# Altium PCB PCB1.PcbDoc
Units mm, origin at the board's own origin, x right, y up, seen from the top; angles counter-clockwise.
Board outline 300.94 x 149.92 mm, 2 copper layers (Top Layer, Bottom Layer); 68 components, 177 nets, 469 pads, 13 vias.
Unrouted connection lines stored in the file: 1.
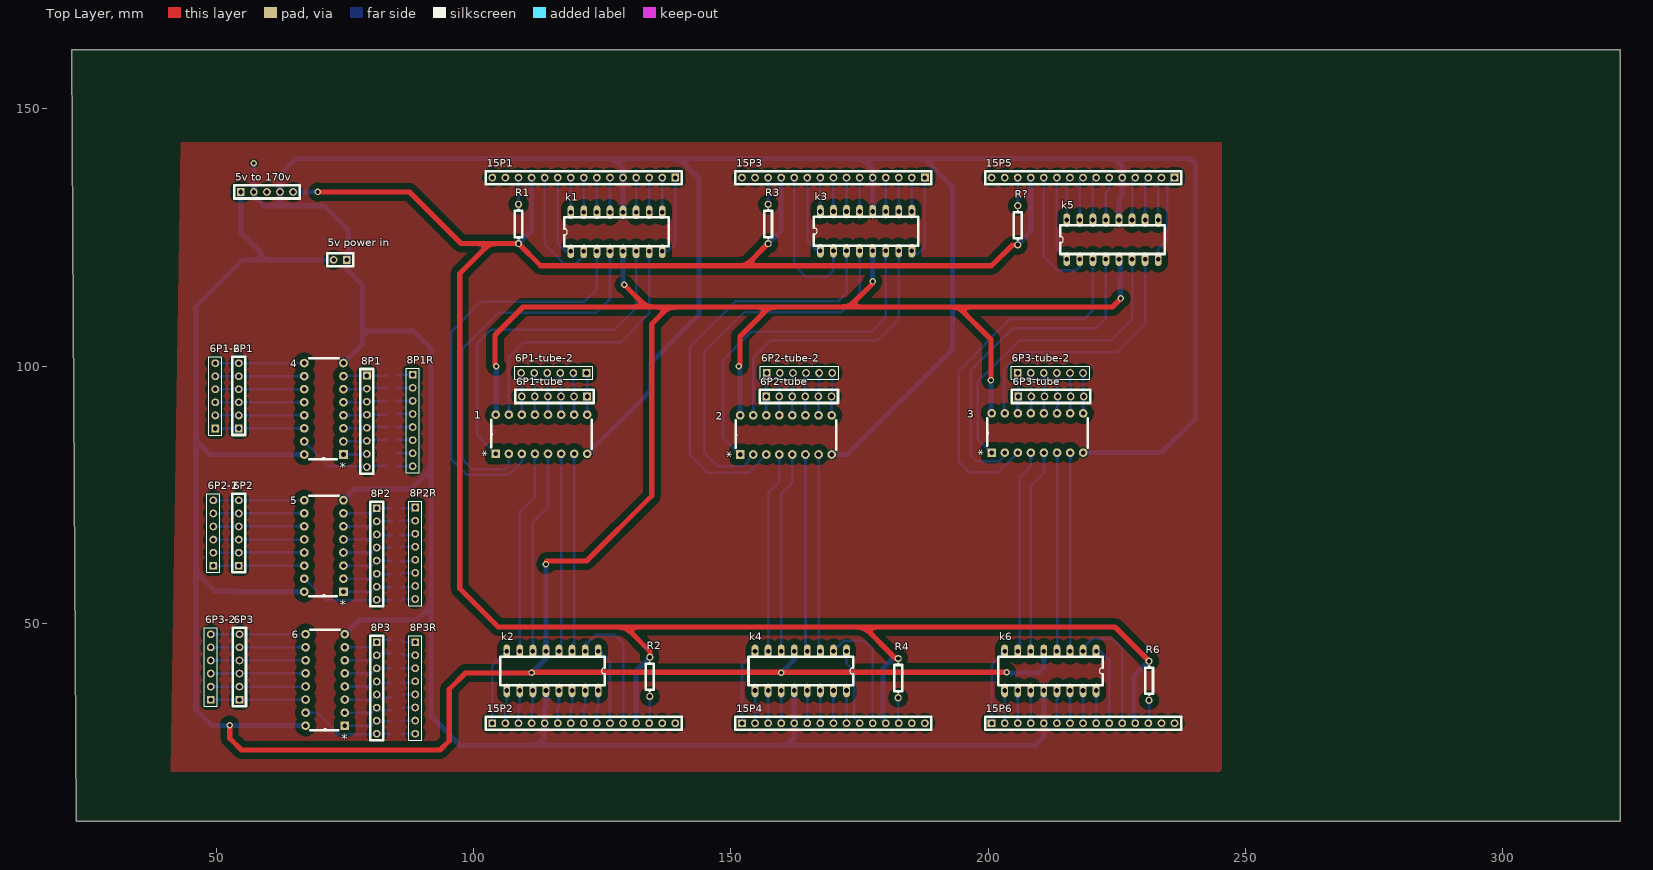
[diagram p0: Top Layer view]
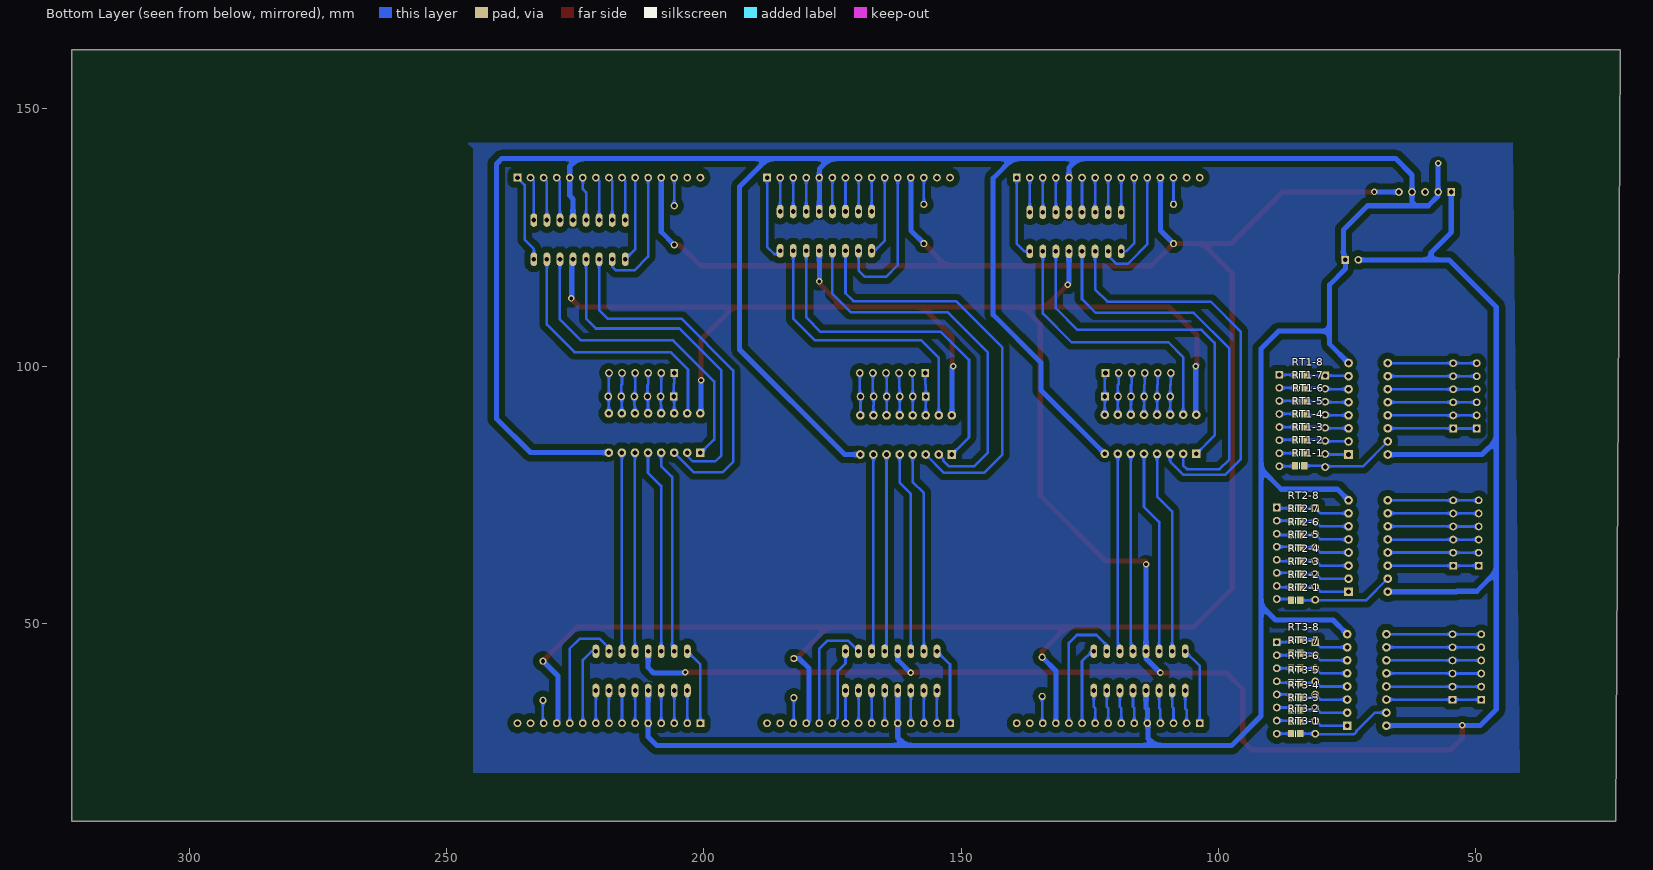
[diagram p1: Bottom Layer view, seen from below]

## Layer stack, top to bottom
Top Solder: solder mask 0.0102, Solder Resist, Dk 3.5
Top Layer: signal copper 0.0356
Dielectric 1: dielectric 0.32, FR-4, Dk 4.8
Bottom Layer: signal copper 0.0356
Bottom Solder: solder mask 0.0102, Solder Resist, Dk 3.5

## Board outline
22.098,126.111 21.898,161.481 322.834,161.481 322.834,11.557 22.747,11.557

## Design rules (kind name [scope] priority, off if disabled: settings)
Clearance [All] p1: gap=0.6 ignorepadtopadclearanceinfootprint=FALSE
NetsToIgnore [All] p1:
PolygonConnect [All] p1: connectstyle=Relief reliefconductorwidth=0.254 reliefentries=4 polygonreliefangle="90 Angle" airgapwidth=0.254
RoutingLayers RoutingLayers_1 [All] p1: top layer_v5=TRUE bottom layer_v5=TRUE
RoutingPriority RoutingPriority_1 [All] p1: routingpriority=0
RoutingVias [All] p1: holewidth=0.711 width=1.27 viastyle="Through Hole" minholewidth=0.711 minwidth=1.27 maxholewidth=0.711 maxwidth=1.27
SolderMaskExpansion [All] p1: expansion=0.102
Width [All] p1: maxlimit=1 minlimit=0.5 preferedwidth=1 toplayer_minwidth=1 bottomlayer_prefwidth=0.5 minimp=50.000000 maximp=50.000000 favimp=50.000000
28 further rules are at their usual default settings.

## Components (designator, comment, footprint, x,y, rotation, side; value= is the part's Value field where it differs from the comment)
1 "74HC595" *DIP254P762X444-16 122.071,90.583 r90 top
2 "74HC595" *DIP254P762X444-16 169.569,90.449 r90 top
3 "74HC595" *DIP254P762X444-16 218.464,90.823 r90 top
4 "74HC595" *DIP254P762X444-16 67.07,100.608 r180 top
5 "74HC595" *DIP254P762X444-16 67.07,73.938 r180 top
"5v power in" "Header 2" HDR1X2 75.311,120.65 r180 top
"5v to 170v" "Header 5" HDR1X5 54.737,133.858 r0 top
6 "74HC595" *DIP254P762X444-16 67.324,47.903 r180 top
6P1 "Header 6" HDR1X6 54.356,87.884 r90 top
6P1-2 "Header 6" HDR1X6 49.784,87.884 r90 top
6P1-tube "Header 6" HDR1X6 122.047,94.107 r180 top
6P1-tube-2 "Header 6" HDR1X6 121.92,98.679 r180 top
6P2 "Header 6" HDR1X6 54.356,61.214 r90 top
6P2-2 "Header 6" HDR1X6 49.403,61.214 r90 top
6P2-tube "Header 6" HDR1X6 156.845,94.107 r0 top
6P2-tube-2 "Header 6" HDR1X6 156.972,98.679 r0 top
6P3 "Header 6" HDR1X6 54.483,35.179 r90 top
6P3-2 "Header 6" HDR1X6 48.895,35.179 r90 top
6P3-tube "Header 6" HDR1X6 205.867,94.107 r0 top
6P3-tube-2 "Header 6" HDR1X6 205.74,98.679 r0 top
8P1 "Header 8" HDR1X8 79.248,98.171 r270 top
8P1R "Header 8" HDR1X8 88.138,98.321 r270 top
8P2 "Header 8" HDR1X8 81.153,72.367 r270 top
8P2R "Header 8" HDR1X8 88.646,72.517 r270 top
8P3 "Header 8" HDR1X8 81.153,46.332 r270 top
8P3R "Header 8" HDR1X8 88.646,46.355 r270 top
15P1 "Header 15" HDR1X15 139.192,136.652 r180 top
15P2 "Header 15" HDR1X15 103.632,30.607 r0 top
15P3 "Header 15" HDR1X15 187.706,136.652 r180 top
15P4 "Header 15" HDR1X15 152.146,30.607 r0 top
15P5 "Header 15" HDR1X15 236.22,136.652 r180 top
15P6 "Header 15" HDR1X15 200.66,30.607 r0 top
k1 "K155ID1" K155ID1 -1.905,234.061 r0 top
k2 "K155ID1" K155ID1 244.983,-67.183 r180 top
k3 "K155ID1" K155ID1 46.609,234.188 r0 top
k4 "K155ID1" K155ID1 293.243,-67.183 r180 top
k5 "K155ID1" K155ID1 94.488,232.537 r0 top
k6 "K155ID1" K155ID1 341.757,-67.183 r180 top
R1 "Res2" AXIAL-0.3 108.712,127.635 r90 top value=22K
R2 "Res2" AXIAL-0.3 134.239,39.624 r270 top value=22K
R3 "Res3" AXIAL-0.3 157.226,127.635 r90 top value=22K
R4 "Res4" AXIAL-0.3 182.499,39.37 r270 top value=22K
R6 "Res6" AXIAL-0.3 231.267,38.862 r90 top value=22K
R? "Res5" AXIAL-0.3 205.74,127.381 r90 top value=22K
RT1-1 "Res Thermal" 6-0805_N 84.201,80.645 r0 bottom
RT1-2 "Res Thermal" 6-0805_N 84.201,83.167 r0 bottom
RT1-3 "Res Thermal" 6-0805_N 84.201,85.689 r0 bottom
RT1-4 "Res Thermal" 6-0805_N 84.201,88.211 r0 bottom
RT1-5 "Res Thermal" 6-0805_N 84.201,90.732 r0 bottom
RT1-6 "Res Thermal" 6-0805_N 84.074,93.218 r0 bottom
RT1-7 "Res Thermal" 6-0805_N 84.201,95.776 r0 bottom
RT1-8 "Res Thermal" 6-0805_N 84.201,98.298 r0 bottom
RT2-1 "Res Thermal" 6-0805_N 84.963,54.483 r0 bottom
RT2-2 "Res Thermal" 6-0805_N 84.963,57.023 r0 bottom
RT2-3 "Res Thermal" 6-0805_N 84.963,59.563 r0 bottom
RT2-4 "Res Thermal" 6-0805_N 84.963,62.103 r0 bottom
RT2-5 "Res Thermal" 6-0805_N 84.963,64.77 r0 bottom
RT2-6 "Res Thermal" 6-0805_N 84.963,67.183 r0 bottom
RT2-7 "Res Thermal" 6-0805_N 84.963,69.85 r0 bottom
RT2-8 "Res Thermal" 6-0805_N 84.963,72.39 r0 bottom
RT3-1 "Res Thermal" 6-0805_N 84.963,28.575 r0 bottom
RT3-2 "Res Thermal" 6-0805_N 84.963,30.988 r0 bottom
RT3-3 "Res Thermal" 6-0805_N 84.963,33.147 r0 bottom
RT3-4 "Res Thermal" 6-0805_N 84.963,35.56 r0 bottom
RT3-5 "Res Thermal" 6-0805_N 84.963,38.481 r0 bottom
RT3-6 "Res Thermal" 6-0805_N 84.963,41.275 r0 bottom
RT3-7 "Res Thermal" 6-0805_N 84.963,44.196 r0 bottom
RT3-8 "Res Thermal" 6-0805_N 84.963,46.863 r0 bottom

## Footprints (in the part's own frame and the unit in brackets; to place one, negate y for a bottom-side part, rotate by r counter-clockwise, add the part's x,y. Pads: shape width x height; smd on the part's side, far side on the other; paste and mask are expansions set on the pad)
6-0805_N [mm] "Chip Resistor, Body 2.0x1.2mm, IPC Medium Density"
  rect 1.2x1.4 smd: 1(-0.9,0) 2(0.9,0)
  silkscreen extent 0,-0.6 0,0.6, body extent -1.07,-0.7 1.07,0.7, height 0.7
*DIP254P762X444-16 [mil]
  rect 66x66 hole 35.43: 1(-300,700)
  round 66 hole 35.43: 2(-300,600) 3(-300,500) 4(-300,400) 5(-300,300) 6(-300,200) 7(-300,100) 8(-300,0) 9(0,0) 10(0,100) 11(0,200) 12(0,300) 13(0,400) 14(0,500) 15(0,600) 16(0,700)
  silkscreen extent -262,-35 -38,735
AXIAL-0.3 [mm] "Axial Device, Thru-Hole; 2 Leads; 0.3 in Pin Spacing"
  round 1.4 hole 0.85: 1(-3.81,0) 2(3.81,0)
  silkscreen extent -2.77,-0.76 2.77,0.76
HDR1X2 [mm] "Connector; Header; 2 Position"
  rect 1.5x1.5 hole 0.9: 1(0,0)
  round 1.5 hole 0.9: 2(2.54,0)
  silkscreen extent -1.27,-1.27 3.81,1.27
HDR1X5 [mm] "Connector; Header; 5 Position"
  rect 1.5x1.5 hole 0.9: 1(0,0)
  round 1.5 hole 0.9: 2(2.54,0) 3(5.08,0) 4(7.62,0) 5(10.16,0)
  silkscreen extent -1.27,-1.27 11.43,1.27
HDR1X6 [mm] "Connector; Header; 6 Position"
  rect 1.5x1.5 hole 0.9: 1(0,0)
  round 1.5 hole 0.9: 2(2.54,0) 3(5.08,0) 4(7.62,0) 5(10.16,0) 6(12.7,0)
  silkscreen extent -1.27,-1.27 13.97,1.27
HDR1X8 [mm] "Connector; Header; 8 Position"
  rect 1.5x1.5 hole 0.9: 1(0,0)
  round 1.5 hole 0.9: 2(2.54,0) 3(5.08,0) 4(7.62,0) 5(10.16,0) 6(12.7,0) 7(15.24,0) 8(17.78,0)
  silkscreen extent -1.27,-1.27 19.05,1.27
HDR1X15 [mm] "Connector; Header; 15 Position"
  rect 1.5x1.5 hole 0.9: 1(0,0)
  round 1.5 hole 0.9: 2(2.54,0) 3(5.08,0) 4(7.62,0) 5(10.16,0) 6(12.7,0) 7(15.24,0) 8(17.78,0) 9(20.32,0) 10(22.86,0) 11(25.4,0) 12(27.94,0) 13(30.48,0) 14(33.02,0) 15(35.56,0)
  silkscreen extent -1.27,-1.27 36.83,1.27
K155ID1 [mil]
  oval 52x104 hole 35.43: 1(4755,-4400) 2(4855,-4400) 3(4955,-4400) 4(5055,-4400) 5(5155,-4400) 6(5255,-4400) 7(5355,-4400) 8(5455,-4400) 9(5455,-4100) 10(5355,-4100) 11(5255,-4100) 12(5155,-4100) 13(5055,-4100) 14(4955,-4100) 15(4855,-4100) 16(4755,-4100)
  silkscreen extent 4705,-4360 5505,-4140

## Part data
"5v power in": "Header, 2-Pin", LatestRevisionDate=17-Jul-2002, LatestRevisionNote="Re-released for DXP Platform.", Publisher="Altium Limited"
"5v to 170v": "Header, 5-Pin", LatestRevisionDate=17-Jul-2002, LatestRevisionNote="Re-released for DXP Platform.", Publisher="Altium Limited"
6P1 6P1-2 6P1-tube 6P1-tube-2 6P2 6P2-2 6P2-tube 6P2-tube-2 6P3 6P3-2 6P3-tube 6P3-tube-2: "Header, 6-Pin", LatestRevisionDate=17-Jul-2002, LatestRevisionNote="Re-released for DXP Platform.", Publisher="Altium Limited"
8P1 8P1R 8P2 8P2R 8P3 8P3R: "Header, 8-Pin", LatestRevisionDate=17-Jul-2002, LatestRevisionNote="Re-released for DXP Platform.", Publisher="Altium Limited"
15P1 15P2 15P3 15P4 15P5 15P6: "Header, 15-Pin", LatestRevisionDate=17-Jul-2002, LatestRevisionNote="Re-released for DXP Platform.", Publisher="Altium Limited"
R1 R2 R3 R4 R6 R?: library part Res1, "Resistor", LatestRevisionDate=17-Jul-2002, LatestRevisionNote="Re-released for DXP Platform.", PackageDescription="Axial Device, Thru-Hole; 2 Leads; 0.3 in Pin Spacing", PackageReference=AXIAL-0.3, Published=8-Jun-2000, Publisher="Altium Limited"
RT1-1 RT1-2 RT1-3 RT1-4 RT1-5 RT1-6 RT1-7 RT1-8 RT2-1 RT2-2 RT2-3 RT2-4 RT2-5 RT2-6 RT2-7 RT2-8 RT3-1 RT3-2 RT3-3 RT3-4 RT3-5 RT3-6 RT3-7 RT3-8: "Thermistor", Code_IPC=RESC2012, LatestRevisionDate=29-May-2009, LatestRevisionNote="IPC-7351 Footprint Added.", PackageDescription="Chip Resistor 0805 Case Size", PackageReference=6-0805, PackageVersion=Mar-2003, Published=24-Mar-1999, Publisher="Altium Limited"

## Via types
v1: diameter 1.27, hole 0.711, Top Layer to Bottom Layer, 13 vias

## Nets (pads, with @x,y where several pads share a name; then routed paths per layer and width w, separated by ;. In a path a pad name is that pad's centre, name@x,y a point inside that pad or via, vN(x,y) a via of type N, cw(c..) or ccw(c..) an arc to the next point about the centre after c; other vN are vias at no path point)
GND: 1.8 2.8 3.8 4.8 5.8 6.8 15P1.5 15P2.5 15P3.5 15P4.5 15P5.5 15P6.5 "5v power in.1" "5v to 170v.2" "5v to 170v.4" k1.12 k2.12 k3.12 k4.12 k5.12 k6.12 | length 768.8
  Bottom Layer w1: v1@57.277,139.065 57.277,133.858 57.277,133.096 59.182,131.191 70.993,131.191 75.692,126.492 75.692,121.031 75.311,120.65 75.311,118.872 78.359,115.824 78.359,106.807 ; 61.722,131.318 62.357,131.953 62.357,133.858 62.357,137.16 65.532,140.335 127.254,140.335 ; 5.8 76.835,76.082 87.766,76.082 91.694,80.01 ; 4.8 78.359,104.276 78.359,106.807 ; 6.8 77.715,50.673 88.9,50.673 91.694,53.467 ; k2.12 114.046,33.579 113.792,33.325 15P2.5 113.665,30.607 113.665,27.686 112.268,26.289 ; 1.8 134.493,95.385 134.493,100.711 143.764,109.982 143.764,136.525 139.954,140.335 ; k1.12 15P1.5 129.032,138.557 127.254,140.335 ; k4.12 15P4.5 162.306,27.813 160.782,26.289 ; 2.8 172.618,82.829 193.04,103.251 193.04,134.874 187.579,140.335 ; k3.12 15P3.5 177.546,138.303 175.514,140.335 ; k6.12 15P6.5 210.82,27.94 209.169,26.289 160.782,26.289 ; 3.8 233.698,83.203 240.284,89.789 240.284,139.319 239.268,140.335 224.536,140.335 ; k5.12 225.425,132.512 226.06,133.147 15P5.5 226.06,138.811 224.536,140.335 ; 78.359,106.807 88.265,106.807 91.694,103.378 91.694,80.01 ; 91.694,53.467 91.694,32.004 97.409,26.289 112.268,26.289 ; 91.694,53.467 91.694,80.01 ; 112.268,26.289 160.782,26.289 ; 127.254,140.335 139.954,140.335 ; 139.954,140.335 175.514,140.335 ; 175.514,140.335 187.579,140.335 ; 187.579,140.335 224.536,140.335
  other v1: 57.277,139.446
Net1_1: 1.1 k1.6 | length 67.7
  Bottom Layer w0.5: 1.1 100.711,86.543 100.711,104.521 103.251,107.061 127.381,107.061 131.572,111.252 k1.6
Net1_2: 1.2 k1.4 | length 75.8
  Bottom Layer w0.5: 1.2 106.831,80.669 106.129,79.967 99.738,79.967 97.917,81.788 97.917,103.505 104.775,110.363 123.825,110.363 126.492,113.03 k1.4
Net1_3: 1.3 k1.3 | length 81.5
  Bottom Layer w0.5: 1.3 109.371,81.431 106.807,78.867 98.679,78.867 95.631,81.915 95.631,106.68 101.473,112.522 121.539,112.522 123.952,114.935 k1.3
Net1_4: 1.4 k2.7 | length 39.6
  Bottom Layer w0.5: k2.7 108.966,71.755 111.911,74.7 1.4
Net1_5: 1.5 k2.6 | length 39.6
  Bottom Layer w0.5: k2.6 111.506,69.723 114.451,72.668 1.5
Net1_6: 1.6 k2.4 | length 38.6
  Bottom Layer w0.5: k2.4 116.991,44.982 1.6
Net1_7: 1.7 k2.3 | length 38.6
  Bottom Layer w0.5: k2.3 119.531,44.982 1.7
Net1_9: 1.9 6P1-tube-2.1 6P1-tube.1 | length 8.2
  Bottom Layer w0.5: 6P1-tube-2.1 122.047,98.552 6P1-tube.1 122.047,92.354 122.071,92.331 1.9
Net1_10: 1.10 6P1-tube-2.2 6P1-tube.2 | length 8.2
  Bottom Layer w0.5: 6P1-tube-2.2 119.38,96.469 119.507,96.342 6P1-tube.2 119.507,92.354 119.531,92.331 1.10
Net1_11: 1.11 6P1-tube-2.3 6P1-tube.3 | length 8.2
  Bottom Layer w0.5: 6P1-tube-2.3 116.84,96.469 116.967,96.342 6P1-tube.3 116.967,92.354 116.991,92.331 1.11
Net1_12: 1.12 6P1-tube-2.4 6P1-tube.4 | length 8.2
  Bottom Layer w0.5: 6P1-tube-2.4 114.3,96.469 114.427,96.342 6P1-tube.4 114.427,92.354 114.451,92.331 1.12
Net1_13: 1.13 6P1-tube-2.5 6P1-tube.5 | length 8.2
  Bottom Layer w0.5: 6P1-tube-2.5 111.76,96.469 111.887,96.342 6P1-tube.5 111.887,92.354 111.911,92.331 1.13
Net1_14: 1.14 6P1-tube-2.6 6P1-tube.6 | length 8.2
  Bottom Layer w0.5: 6P1-tube-2.6 109.22,96.469 109.347,96.342 6P1-tube.6 109.347,92.354 109.371,92.331 1.14
Net1_15: 1.15 k1.7 | length 54
  Bottom Layer w0.5: 1.15 106.831,101.751 109.728,104.648 128.524,104.648 134.112,110.236 k1.7
Net1_16: 1.16 2.16 3.16 4.16 5.16 6.16 "5v power in.2" "5v to 170v.1" k1.5 k2.5 k3.5 k4.5 k5.5 k6.5 | length 680.9
  Top Layer w1: v1(52.578,30.226) 52.578,27.686 54.864,25.4 93.472,25.4 95.25,27.178 95.25,37.211 98.425,40.386 v1(111.252,40.386) v1@111.316,40.513 ; v1@104.14,100.203 104.14,106.045 109.601,111.506 133.604,111.506 ; v1@111.249,40.639 111.379,40.64 v1@111.316,40.513 ; v1(114.046,61.468) 114.173,62.103 121.92,62.103 134.62,74.803 134.62,108.204 137.922,111.506 ; v1(129.286,115.824) 133.604,111.506 ; v1(151.511,99.949) 151.765,100.203 151.765,105.791 157.48,111.506 ; v1(177.546,116.459) 177.546,116.078 172.974,111.506 ; v1(200.533,97.282) 200.533,105.156 194.183,111.506 ; v1(203.581,40.513) v1@111.316,40.513 ; v1(225.789,113.157) 224.138,111.506 194.183,111.506 ; 133.604,111.506 137.922,111.506 ; 137.922,111.506 157.48,111.506 ; 157.48,111.506 172.974,111.506 ; 172.974,111.506 194.183,111.506
  Bottom Layer w1: 54.737,133.858 54.737,125.984 58.674,122.047 58.674,120.65 ; 5.16 53.721,56.158 53.618,56.261 49.784,56.261 45.974,60.071 ; 4.16 67.047,82.804 48.768,82.804 45.974,85.598 ; 6.16 49.125,30.123 45.974,33.274 45.974,60.071 ; 72.771,120.65 58.674,120.65 ; v1@104.14,100.203 v1(104.394,99.949) 104.394,90.686 1.16 ; v1(111.252,40.386) 114.046,43.18 k2.5 v1(114.046,61.468) ; k1.5 129.032,116.078 v1(129.286,115.824) ; v1(151.511,99.949) 151.765,99.822 151.765,90.473 2.16 ; v1(159.766,40.386) 162.306,42.926 k4.5 ; v1(177.546,116.459) k3.5@177.546,121.793 ; v1(200.533,97.282) 200.533,90.974 3.16 ; v1(203.581,40.513) 204.089,40.386 209.804,40.386 210.82,41.402 k6.5 ; k5.5 225.679,120.523 225.679,113.538 v1(225.789,113.157) ; 45.974,60.071 45.974,85.598 ; 45.974,85.598 45.974,111.506 55.118,120.65 58.674,120.65
Net2_1: 2.1 k3.6 | length 67.1
  Bottom Layer w0.5: 2.1 148.463,86.155 148.463,101.219 153.924,106.68 177.292,106.68 180.086,109.474 k3.6@180.086,121.793
Net2_2: 2.2 k3.4 | length 73.9
  Bottom Layer w0.5: 2.2 153.477,81.977 153.477,81.639 152.356,80.518 147.447,80.518 144.78,83.185 144.78,102.616 152.654,110.49 171.45,110.49 175.006,114.046 k3.4@175.006,121.793
Net2_3: 2.3 k3.3 | length 81.1
  Bottom Layer w0.5: 2.3 153.288,79.248 145.542,79.248 141.986,82.804 141.986,103.632 151.003,112.649 170.942,112.649 172.466,114.173 k3.3@172.466,121.793
Net2_4: 2.4 k4.7 | length 39.2
  Bottom Layer w0.5: k4.7 157.226,75.311 159.409,77.494 2.4
Net2_5: 2.5 k4.6 | length 39.2
  Bottom Layer w0.5: k4.6 159.766,75.184 161.949,77.367 2.5
Net2_6: 2.6 k4.4 | length 38.4
  Bottom Layer w0.5: 2.6 164.489,44.934 k4.4
Net2_7: 2.7 k4.3 | length 38.4
  Bottom Layer w0.5: 2.7 167.029,44.934 k4.3
Net2_9: 2.9 6P2-tube-2.6 6P2-tube.6 | length 8.3
  Bottom Layer w0.5: 2.9 169.545,90.449 6P2-tube.6 169.672,94.234 6P2-tube-2.6
Net2_10: 2.10 6P2-tube-2.5 6P2-tube.5 | length 8.3
  Bottom Layer w0.5: 2.10 167.029,92.254 167.005,92.278 6P2-tube.5 167.132,94.234 6P2-tube-2.5
Net2_11: 2.11 6P2-tube-2.4 6P2-tube.4 | length 8.3
  Bottom Layer w0.5: 2.11 164.465,90.449 6P2-tube.4 164.465,98.552 6P2-tube-2.4
Net2_12: 2.12 6P2-tube-2.3 6P2-tube.3 | length 8.3
  Bottom Layer w0.5: 2.12 161.949,92.254 161.925,92.278 6P2-tube.3 161.925,95.656 162.052,95.783 6P2-tube-2.3
Net2_13: 2.13 6P2-tube-2.2 6P2-tube.2 | length 8.3
  Bottom Layer w0.5: 2.13 159.385,90.449 6P2-tube.2 159.385,97.663 159.512,97.79 6P2-tube-2.2
Net2_14: 2.14 6P2-tube-2.1 6P2-tube.1 | length 8.3
  Bottom Layer w0.5: 2.14 156.869,92.254 156.845,92.278 6P2-tube.1 156.845,96.317 156.972,96.444 6P2-tube-2.1
Net2_15: 2.15 k3.7 | length 55.2
  Bottom Layer w0.5: 2.15 154.329,101.624 157.734,105.029 178.435,105.029 182.626,109.22 k3.7@182.626,121.793
Net3_1: 3.1 k5.6 | length 61.7
  Bottom Layer w0.5: 3.1 200.515,83.203 197.993,85.725 197.993,97.028 205.994,105.029 223.901,105.029 227.965,109.093 k5.6
Net3_2: 3.2 k5.4 | length 66.7
  Bottom Layer w0.5: 3.2 203.224,82.574 202.165,81.515 197.758,81.515 196.596,82.677 196.596,99.187 204.724,107.315 220.98,107.315 222.885,109.22 k5.4
Net3_3: 3.3 k5.3 | length 72.4
  Bottom Layer w0.5: 3.3 201.936,79.375 196.342,79.375 194.31,81.407 194.31,99.187 204.343,109.22 218.694,109.22 220.345,110.871 k5.3
Net3_4: 3.4 k6.7 | length 39.7
  Bottom Layer w0.5: k6.7 206.169,45.006 206.169,78.486 208.304,80.621 3.4
Net3_5: 3.5 k6.6 | length 39.7
  Bottom Layer w0.5: k6.6 208.28,76.708 210.844,79.272 3.5
Net3_6: 3.6 k6.4 | length 38.6
  Bottom Layer w0.5: k6.4 213.384,44.601 3.6
Net3_7: 3.7 k6.3 | length 38.6
  Bottom Layer w0.5: k6.3 215.924,44.601 3.7
Net3_9: 3.9 6P3-tube-2.6 6P3-tube.6 | length 8
  Bottom Layer w0.5: 6P3-tube-2.6 218.44,94.234 6P3-tube.6 218.464,94.004 3.9
Net3_10: 3.10 6P3-tube-2.5 6P3-tube.5 | length 8
  Bottom Layer w0.5: 6P3-tube-2.5 215.9,96.469 216.027,96.342 6P3-tube.5 215.924,94.107 3.10
Net3_11: 3.11 6P3-tube-2.4 6P3-tube.4 | length 8
  Bottom Layer w0.5: 6P3-tube-2.4 213.36,94.107 6P3-tube.4 213.487,92.507 213.384,92.404 3.11
Net3_12: 3.12 6P3-tube-2.3 6P3-tube.3 | length 8
  Bottom Layer w0.5: 6P3-tube-2.3 210.82,96.469 210.947,96.342 6P3-tube.3 210.844,94.107 3.12
Net3_13: 3.13 6P3-tube-2.2 6P3-tube.2 | length 8
  Bottom Layer w0.5: 6P3-tube-2.2 208.28,94.107 6P3-tube.2 208.407,92.507 208.304,92.404 3.13
Net3_14: 3.14 6P3-tube-2.1 6P3-tube.1 | length 8
  Bottom Layer w0.5: 6P3-tube-2.1 205.74,96.647 205.867,96.52 6P3-tube.1 205.764,94.004 3.14
Net3_15: 3.15 k5.7 | length 52.3
  Bottom Layer w0.5: 3.15 203.073,90.974 203.073,99.314 206.502,102.743 225.171,102.743 230.505,108.077 k5.7
Net4_1: 4.1 8P1.7 RT1-2.1 | length 4.6
  Bottom Layer w0.5: 4.1 79.145,82.828 8P1.7
Net4_2: 4.2 8P1.6 RT1-3.1 | length 8.7
  Bottom Layer w0.5: 4.2 79.145,85.368 8P1.6 79.466,85.689 RT1-3.1
Net4_3: 4.3 8P1.5 RT1-4.1 | length 8.7
  Bottom Layer w0.5: 4.3 79.145,87.908 8P1.5 79.448,88.211 RT1-4.1
Net4_4: 4.4 8P1.4 RT1-5.1 | length 8.7
  Bottom Layer w0.5: 4.4 79.145,90.448 8P1.4 83.12,90.551 RT1-5.1
Net4_5: 4.5 8P1.3 RT1-6.1 | length 8.6
  Bottom Layer w0.5: 4.5 79.145,92.988 8P1.3 79.375,93.218 RT1-6.1
Net4_6: 4.6 8P1.2 RT1-7.1 | length 8.7
  Bottom Layer w0.5: 4.6 79.145,95.528 8P1.2 79.393,95.776 RT1-7.1
Net4_7: 4.7 8P1.1 RT1-8.1 | length 8.7
  Bottom Layer w0.5: 4.7 74.794,98.171 8P1.1 83.174,98.171 RT1-8.1
Net4_9: 4.9 6P1-2.6 6P1.6 | length 17.3
  Bottom Layer w0.5: 6P1-2.6 6P1.6 67.047,100.584 4.9
Net4_10: 4.10 6P1-2.5 6P1.5 | length 17.3
  Bottom Layer w0.5: 6P1-2.5 6P1.5 54.38,98.068 4.10
Net4_11: 4.11 6P1-2.4 6P1.4 | length 17.3
  Bottom Layer w0.5: 6P1-2.4 6P1.4 67.047,95.504 4.11
Net4_12: 4.12 6P1-2.3 6P1.3 | length 17.3
  Bottom Layer w0.5: 6P1-2.3 6P1.3 54.38,92.988 4.12
Net4_13: 4.13 6P1-2.2 6P1.2 | length 17.3
  Bottom Layer w0.5: 6P1-2.2 6P1.2 67.047,90.424 4.13
Net4_14: 4.14 6P1-2.1 6P1.1 | length 17.3
  Bottom Layer w0.5: 6P1-2.1 6P1.1 54.38,87.908 4.14
Net4_15: 4.15 8P1.8 RT1-1.1 | length 18.5
  Bottom Layer w0.5: 4.15 71.92,80.518 79.248,80.518 8P1.8 79.502,80.645 RT1-1.1
Net5_1: 5.1 8P2.7 RT2-2.1 | length 9.8
  Bottom Layer w0.5: 5.1 80.184,56.158 8P2.7 81.257,57.023 RT2-2.1
Net5_2: 5.2 8P2.6 RT2-3.1 | length 9.8
  Bottom Layer w0.5: 5.2 80.184,58.698 8P2.6 81.257,59.563 RT2-3.1
Net5_3: 5.3 8P2.5 RT2-4.1 | length 9.8
  Bottom Layer w0.5: 5.3 80.184,61.238 8P2.5 83.959,62.207 RT2-4.1
Net5_4: 5.4 8P2.4 RT2-5.1 | length 9.8
  Bottom Layer w0.5: 5.4 80.184,63.778 8P2.4 81.176,64.77 RT2-5.1
Net5_5: 5.5 8P2.3 RT2-6.1 | length 9.8
  Bottom Layer w0.5: 5.5 80.184,66.318 8P2.3 81.257,67.183 RT2-6.1
Net5_6: 5.6 8P2.2 RT2-7.1 | length 9.8
  Bottom Layer w0.5: 5.6 80.184,68.858 8P2.2 81.176,69.85 RT2-7.1
Net5_7: 5.7 8P2.1 RT2-8.1 | length 9.8
  Bottom Layer w0.5: 5.7 80.184,71.398 8P2.1 84.04,72.367 RT2-8.1
Net5_9: 5.9 6P2-2.6 6P2.6 | length 17.7
  Bottom Layer w0.5: 6P2-2.6 6P2.6 67.047,73.914 5.9
Net5_10: 5.10 6P2-2.5 6P2.5 | length 17.7
  Bottom Layer w0.5: 6P2-2.5 6P2.5 54.38,71.398 5.10
Net5_11: 5.11 6P2-2.4 6P2.4 | length 17.7
  Bottom Layer w0.5: 6P2-2.4 6P2.4 54.38,68.858 5.11
Net5_12: 5.12 6P2-2.3 6P2.3 | length 17.7
  Bottom Layer w0.5: 6P2-2.3 6P2.3 67.047,66.294 5.12
Net5_13: 5.13 6P2-2.2 6P2.2 | length 17.7
  Bottom Layer w0.5: 6P2-2.2 6P2.2 54.38,63.778 5.13
Net5_14: 5.14 6P2-2.1 6P2.1 | length 17.7
  Bottom Layer w0.5: 6P2-2.1 6P2.1 67.047,61.214 5.14
Net5_15: 5.15 8P2.8 RT2-1.1 | length 18.8
  Bottom Layer w0.5: 5.15 71.298,54.47 81.035,54.47 8P2.8 81.257,54.483 RT2-1.1
"Net5v to 170v_5": 15P1.12 15P2.12 15P3.12 15P4.12 15P5.12 15P6.12 "5v to 170v.5" R1.1 R2.1 R3.1 R4.1 R6.2 R?.1 | length 464.6
  Top Layer w1: v1(69.723,133.858) 87.503,133.858 97.536,123.825 103.124,123.825 ; R2.1 134.239,44.577 129.54,49.276 ; R3.1 152.908,119.507 ; R4.1 181.991,43.18 175.895,49.276 ; R?.1 204.724,123.571 200.66,119.507 152.908,119.507 ; R6.2 224.663,49.276 175.895,49.276 ; 103.124,123.825 97.282,117.983 97.282,56.769 104.775,49.276 129.54,49.276 ; 103.124,123.825 R1.1 113.03,119.507 152.908,119.507 ; 129.54,49.276 175.895,49.276
  Bottom Layer w1: 64.897,133.858 v1(69.723,133.858) ; R1.1 111.252,126.365 15P1.12 ; 15P2.12 131.572,40.767 R2.1 ; R3.1 159.766,126.365 15P3.12 ; 15P4.12 179.578,31.115 179.578,41.275 181.483,43.18 R4.1 ; R?.1 208.28,126.111 15P5.12 ; 15P6.12 228.346,30.861 228.346,39.751 R6.2
Net6_1: 6.1 8P3.7 RT3-2.1 | length 9.6
  Bottom Layer w0.5: 6.1 80.184,30.123 8P3.7 81.257,30.988 RT3-2.1
Net6_2: 6.2 8P3.6 RT3-3.1 | length 9.7
  Bottom Layer w0.5: 6.2 80.184,32.663 8P3.6 81.638,33.147 RT3-3.1
Net6_3: 6.3 8P3.5 RT3-4.1 | length 9.8
  Bottom Layer w0.5: 6.3 80.184,35.203 8P3.5 81.765,35.56 RT3-4.1
Net6_4: 6.4 8P3.4 RT3-5.1 | length 9.6
  Bottom Layer w0.5: 6.4 80.184,37.743 8P3.4 81.384,38.481 RT3-5.1
Net6_5: 6.5 8P3.3 RT3-6.1 | length 9.5
  Bottom Layer w0.5: 6.5 80.184,40.283 8P3.3 81.176,41.275 RT3-6.1
Net6_6: 6.6 8P3.2 RT3-7.1 | length 9.7
  Bottom Layer w0.5: 6.6 80.184,42.823 8P3.2 81.557,44.196 RT3-7.1
Net6_7: 6.7 8P3.1 RT3-8.1 | length 9.7
  Bottom Layer w0.5: 6.7 80.184,45.363 8P3.1 81.684,46.863 RT3-8.1
Net6_9: 6.9 6P3-2.6 6P3.6 | length 18.4
  Bottom Layer w0.5: 6P3-2.6 6P3.6 67.301,47.879 6.9
Net6_10: 6.10 6P3-2.5 6P3.5 | length 18.4
  Bottom Layer w0.5: 6P3-2.5 6P3.5 54.507,45.363 6.10
Net6_11: 6.11 6P3-2.4 6P3.4 | length 17.5
  Bottom Layer w0.5: 6P3-2.4 6P3.4 66.421,42.799
Net6_12: 6.12 6P3-2.3 6P3.3 | length 18.4
  Bottom Layer w0.5: 6P3-2.3 6P3.3 54.507,40.283 6.12
Net6_13: 6.13 6P3-2.2 6P3.2 | length 18.4
  Bottom Layer w0.5: 6P3-2.2 6P3.2 67.301,37.719 6.13
Net6_14: 6.14 6P3-2.1 6P3.1 | length 18.4
  Bottom Layer w0.5: 6P3-2.1 6P3.1 54.507,35.203 6.14
Net6_15: 6.15 8P3.8 RT3-1.1 | length 18.7
  Bottom Layer w0.5: 6.15 69.572,32.663 73.152,29.083 73.152,28.875 73.493,28.535 73.654,28.535 73.754,28.435 81.153,28.435 8P3.8 81.176,28.575 RT3-1.1
Net8P1R_1: 8P1R.1 RT1-8.2 | length 3
  Bottom Layer w0.5: RT1-8.2 88.115,98.298 8P1R.1
Net8P1R_2: 8P1R.2 RT1-7.2 | length 3
  Bottom Layer w0.5: RT1-7.2 88.133,95.776 8P1R.2
Net8P1R_3: 8P1R.3 RT1-6.2 | length 3.2
  Bottom Layer w0.5: RT1-6.2 84.997,93.241 8P1R.3
Net8P1R_4: 8P1R.4 RT1-5.2 | length 3
  Bottom Layer w0.5: RT1-5.2 88.107,90.732 8P1R.4
Net8P1R_5: 8P1R.5 RT1-4.2 | length 3.1
  Bottom Layer w0.5: RT1-4.2 85.151,88.161 8P1R.5
Net8P1R_6: 8P1R.6 RT1-3.2 | length 3.1
  Bottom Layer w0.5: RT1-3.2 88.07,85.689 8P1R.6
Net8P1R_7: 8P1R.7 RT1-2.2 | length 3.1
  Bottom Layer w0.5: RT1-2.2 85.187,83.081 8P1R.7
Net8P1R_8: 8P1R.8 RT1-1.2 | length 3.1
  Bottom Layer w0.5: RT1-1.2 85.205,80.541 8P1R.8
Net8P2R_1: 8P2R.1 RT2-8.2 | length 2.8
  Bottom Layer w0.5: RT2-8.2 88.519,72.39 8P2R.1
Net8P2R_2: 8P2R.2 RT2-7.2 | length 3.2
  Bottom Layer w0.5: RT2-7.2@85.513,69.827 85.513,69.85 85.725,69.85 85.852,69.977 8P2R.2
Net8P2R_3: 8P2R.3 RT2-6.2 | length 2.9
  Bottom Layer w0.5: RT2-6.2 88.392,67.183 8P2R.3
Net8P2R_4: 8P2R.4 RT2-5.2 | length 2.8
  Bottom Layer w0.5: RT2-5.2 85.99,64.897 8P2R.4
Net8P2R_5: 8P2R.5 RT2-4.2 | length 2.9
  Bottom Layer w0.5: RT2-4.2 88.392,62.103 8P2R.5
Net8P2R_6: 8P2R.6 RT2-3.2 | length 2.9
  Bottom Layer w0.5: RT2-3.2 86.117,59.817 8P2R.6
Net8P2R_7: 8P2R.7 RT2-2.2 | length 2.9
  Bottom Layer w0.5: RT2-2.2 88.392,57.023 8P2R.7
Net8P2R_8: 8P2R.8 RT2-1.2 | length 2.9
  Bottom Layer w0.5: RT2-1.2 86.117,54.737 8P2R.8
Net8P3R_1: 8P3R.1 RT3-8.2 | length 3
  Bottom Layer w0.5: RT3-8.2 86.371,46.355 8P3R.1
Net8P3R_2: 8P3R.2 RT3-7.2 | length 2.9
  Bottom Layer w0.5: RT3-7.2 86.244,43.815 8P3R.2
Net8P3R_3: 8P3R.3 RT3-6.2 | length 2.7
  Bottom Layer w0.5: RT3-6.2@85.979,41.148 86.106,41.275 8P3R.3
Net8P3R_4: 8P3R.4 RT3-5.2 | length 2.9
  Bottom Layer w0.5: RT3-5.2 88.392,38.481 8P3R.4
Net8P3R_5: 8P3R.5 RT3-4.2 | length 2.3
  Bottom Layer w0.5: RT3-4.2@86.36,36.195 8P3R.5
Net8P3R_6: 8P3R.6 RT3-3.2 | length 2.4
  Bottom Layer w0.5: RT3-3.2@86.233,33.655 8P3R.6
Net8P3R_7: 8P3R.7 RT3-2.2 | length 2.8
  Bottom Layer w0.5: RT3-2.2 85.99,31.115 8P3R.7
Net8P3R_8: 8P3R.8 RT3-1.2 | length 2.8
  Bottom Layer w0.5: RT3-1.2 8P3R.8
Net15P1_1: 15P1.1 k1.8 | length 16
  Bottom Layer w0.5: k1.8 137.668,122.301 139.192,123.825 15P1.1
Net15P1_2: 15P1.2 k1.9 | length 6.7
  Bottom Layer w0.5: k1.9 15P1.2
Net15P1_3: 15P1.3 k1.10 | length 6.7
  Bottom Layer w0.5: k1.10 15P1.3
Net15P1_4: 15P1.4 k1.11 | length 6.7
  Bottom Layer w0.5: k1.11 15P1.4
Net15P1_6: 15P1.6 k1.13 | length 6.7
  Bottom Layer w0.5: k1.13 15P1.6
Net15P1_7: 15P1.7 k1.14 | length 6.7
  Bottom Layer w0.5: k1.14 15P1.7
Net15P1_8: 15P1.8 k1.15 | length 6.7
  Bottom Layer w0.5: k1.15 15P1.8
Net15P1_9: 15P1.9 k1.16 | length 6.7
  Bottom Layer w0.5: k1.16 15P1.9
Net15P1_10: 15P1.10 k1.1 | length 15.9
  Bottom Layer w0.5: 15P1.10 116.332,123.952 117.983,122.301 k1.1
Net15P1_11: 15P1.11 k1.2 | length 23.6
  Bottom Layer w0.5: 15P1.11 113.792,123.698 117.602,119.888 119.761,119.888 121.412,121.539 k1.2
Net15P1_13: 15P1.13 R1.2 | length 5.2
  Bottom Layer w0.5: R1.2 15P1.13
Net15P2_1: 15P2.1 k2.8 | length 15.1
  Bottom Layer w0.5: 15P2.1 103.632,41.783 k2.8
Net15P2_2: 15P2.2 k2.9 | length 6.5
  Bottom Layer w0.5: 15P2.2 106.172,33.198 106.426,33.452 k2.9
Net15P2_3: 15P2.3 k2.10 | length 6.5
  Bottom Layer w0.5: 15P2.3 108.712,33.528 108.966,33.782 k2.10
Net15P2_4: 15P2.4 k2.11 | length 6.5
  Bottom Layer w0.5: 15P2.4 111.252,33.299 111.506,33.553 k2.11
Net15P2_6: 15P2.6 k2.13 | length 6.5
  Bottom Layer w0.5: 15P2.6 116.332,33.528 116.586,33.782 k2.13
Net15P2_7: 15P2.7 k2.14 | length 6.5
  Bottom Layer w0.5: 15P2.7 118.872,33.528 119.126,33.782 k2.14
Net15P2_8: 15P2.8 k2.15 | length 6.5
  Bottom Layer w0.5: 15P2.8 121.412,33.528 121.666,33.782 k2.15
Net15P2_9: 15P2.9 k2.16 | length 6.5
  Bottom Layer w0.5: 15P2.9 123.952,33.528 124.206,33.782 k2.16
Net15P2_10: 15P2.10 k2.1 | length 15.1
  Bottom Layer w0.5: k2.1 124.587,44.577 126.492,42.672 15P2.10
Net15P2_11: 15P2.11 k2.2 | length 25.6
  Bottom Layer w0.5: k2.2 121.666,45.72 123.698,47.752 127.508,47.752 129.032,46.228 15P2.11
Net15P2_13: 15P2.13 R2.2 | length 5.3
  Bottom Layer w0.5: 15P2.13 134.239,30.734 R2.2
Net15P3_1: 15P3.1 k3.8 | length 16.6
  Bottom Layer w0.5: k3.8@185.166,121.793 186.309,121.793 187.706,123.19 15P3.1
Net15P3_2: 15P3.2 k3.9 | length 6.6
  Bottom Layer w0.5: k3.9 15P3.2
Net15P3_3: 15P3.3 k3.10 | length 6.6
  Bottom Layer w0.5: k3.10 15P3.3
Net15P3_4: 15P3.4 k3.11 | length 6.6
  Bottom Layer w0.5: k3.11 15P3.4
Net15P3_6: 15P3.6 k3.13 | length 6.6
  Bottom Layer w0.5: k3.13 15P3.6
Net15P3_7: 15P3.7 k3.14 | length 6.6
  Bottom Layer w0.5: k3.14 15P3.7
Net15P3_8: 15P3.8 k3.15 | length 6.6
  Bottom Layer w0.5: k3.15 15P3.8
Net15P3_9: 15P3.9 k3.16 | length 6.6
  Bottom Layer w0.5: k3.16 15P3.9
Net15P3_10: 15P3.10 k3.1 | length 15.9
  Bottom Layer w0.5: 15P3.10 164.846,124.333 k3.1@167.386,121.793
Net15P3_11: 15P3.11 k3.2 | length 29.3
  Bottom Layer w0.5: 15P3.11 162.306,119.634 164.592,117.348 168.656,117.348 169.926,118.618 k3.2@169.926,121.793
Net15P3_13: 15P3.13 R3.2 | length 5.2
  Bottom Layer w0.5: R3.2 15P3.13
Net15P4_1: 15P4.1 k4.8 | length 15
  Bottom Layer w0.5: 15P4.1 152.146,42.037 k4.8
Net15P4_2: 15P4.2 k4.9 | length 6.3
  Bottom Layer w0.5: 15P4.2 k4.9
Net15P4_3: 15P4.3 k4.10 | length 6.3
  Bottom Layer w0.5: 15P4.3 k4.10
Net15P4_4: 15P4.4 k4.11 | length 6.3
  Bottom Layer w0.5: 15P4.4 k4.11
Net15P4_6: 15P4.6 k4.13 | length 6.3
  Bottom Layer w0.5: 15P4.6 k4.13
Net15P4_7: 15P4.7 k4.14 | length 6.3
  Bottom Layer w0.5: 15P4.7 k4.14
Net15P4_8: 15P4.8 k4.15 | length 6.3
  Bottom Layer w0.5: 15P4.8 k4.15
Net15P4_9: 15P4.9 k4.16 | length 6.3
  Bottom Layer w0.5: 15P4.9 k4.16
Net15P4_10: 15P4.10 k4.1 | length 15
  Bottom Layer w0.5: k4.1 172.466,42.24 173.939,40.767 173.939,31.674 15P4.10
Net15P4_11: 15P4.11 k4.2 | length 23.6
  Bottom Layer w0.5: k4.2 169.926,44.621 171.903,46.598 176.011,46.598 176.022,46.609 177.546,45.085 15P4.11
Net15P4_13: 15P4.13 R4.2 | length 5
  Bottom Layer w0.5: R4.2 182.499,30.734 15P4.13
Net15P5_1: 15P5.1 k5.8 | length 17.2
  Bottom Layer w0.5: k5.8 233.045,122.809 234.823,124.587 234.823,135.255 15P5.1
Net15P5_2: 15P5.2 k5.9 | length 8.5
  Bottom Layer w0.5: k5.9 233.045,136.017 15P5.2
Net15P5_3: 15P5.3 k5.10 | length 8.5
  Bottom Layer w0.5: k5.10 230.505,136.017 15P5.3
Net15P5_4: 15P5.4 k5.11 | length 8.5
  Bottom Layer w0.5: k5.11 227.965,136.017 15P5.4
Net15P5_6: 15P5.6 k5.13 | length 8.5
  Bottom Layer w0.5: k5.13 222.885,133.756 223.52,134.391 15P5.6
Net15P5_7: 15P5.7 k5.14 | length 8.5
  Bottom Layer w0.5: k5.14 220.345,136.017 15P5.7
Net15P5_8: 15P5.8 k5.15 | length 8.5
  Bottom Layer w0.5: k5.15 217.805,136.017 15P5.8
Net15P5_9: 15P5.9 k5.16 | length 8.5
  Bottom Layer w0.5: k5.16 215.265,136.017 15P5.9
Net15P5_10: 15P5.10 k5.1 | length 16.7
  Bottom Layer w0.5: 15P5.10 213.36,122.682 k5.1
Net15P5_11: 15P5.11 k5.2 | length 25.2
  Bottom Layer w0.5: 15P5.11 210.82,121.285 213.499,118.606 217.031,118.606 217.805,119.38 k5.2
Net15P5_13: 15P5.13 R?.2 | length 5.5
  Bottom Layer w0.5: R?.2 15P5.13
Net15P6_1: 15P6.1 k6.8 | length 15
  Bottom Layer w0.5: 15P6.1 200.66,42.037 k6.8
Net15P6_2: 15P6.2 k6.9 | length 6.3
  Bottom Layer w0.5: 15P6.2 k6.9
Net15P6_3: 15P6.3 k6.10 | length 6.3
  Bottom Layer w0.5: 15P6.3 k6.10
Net15P6_4: 15P6.4 k6.11 | length 6.3
  Bottom Layer w0.5: 15P6.4 k6.11
Net15P6_6: 15P6.6 k6.13 | length 6.3
  Bottom Layer w0.5: 15P6.6 k6.13
Net15P6_7: 15P6.7 k6.14 | length 6.3
  Bottom Layer w0.5: 15P6.7 k6.14
Net15P6_8: 15P6.8 k6.15 | length 6.3
  Bottom Layer w0.5: 15P6.8 k6.15
Net15P6_9: 15P6.9 k6.16 | length 6.3
  Bottom Layer w0.5: 15P6.9 k6.16
Net15P6_10: 15P6.10 k6.1 | length 15.5
  Bottom Layer w0.5: k6.1 221.869,44.577 223.52,42.926 15P6.10
Net15P6_11: 15P6.11 k6.2 | length 24.3
  Bottom Layer w0.5: k6.2 218.44,45.212 220.218,46.99 224.155,46.99 226.06,45.085 15P6.11
Net15P6_13: 15P6.13 R6.1 | length 4.5
  Bottom Layer w0.5: 15P6.13 231.267,30.734 R6.1
pads on no net: 15P1.14 15P1.15 15P2.14 15P2.15 15P3.14 15P3.15 15P4.14 15P4.15 15P5.14 15P5.15 15P6.14 15P6.15 "5v to 170v.3"

## Polygon pours and split planes (outlines as drawn)
GND on Bottom Layer "Bottom Layer-No Net" (solid, pour order 18): 42.799,143.383 245.999,143.383 244.856,142.24 244.856,20.955 41.529,20.955 41.402,21.082
GND on Top Layer "AutoNaming" (solid, pour order 20): 43.053,143.51 245.364,143.51 245.364,21.59 244.983,21.209 41.148,21.209

## Text inside footprints (layer, text, board x,y; h text height)
1: Mechanical 4 "*" at 103.423,82.379 h1.88 r90; Mechanical 4 "*" at 103.423,82.379 h1.88 r90; Top Overlay "*" at 103.423,82.379 h1.88 r90
2: Mechanical 4 "*" at 150.921,82.245 h1.88 r90; Mechanical 4 "*" at 150.921,82.245 h1.88 r90; Top Overlay "*" at 150.921,82.245 h1.88 r90
3: Mechanical 4 "*" at 199.816,82.619 h1.88 r90; Mechanical 4 "*" at 199.816,82.619 h1.88 r90; Top Overlay "*" at 199.816,82.619 h1.88 r90
4: Mechanical 4 "*" at 75.274,81.96 h1.88 r180; Mechanical 4 "*" at 75.274,81.96 h1.88 r180; Top Overlay "*" at 75.274,81.96 h1.88 r180
5: Mechanical 4 "*" at 75.274,55.29 h1.88 r180; Mechanical 4 "*" at 75.274,55.29 h1.88 r180; Top Overlay "*" at 75.274,55.29 h1.88 r180
6: Mechanical 4 "*" at 75.528,29.255 h1.88 r180; Mechanical 4 "*" at 75.528,29.255 h1.88 r180; Top Overlay "*" at 75.528,29.255 h1.88 r180